# Altium PCB Sensor_Glove-X02.PcbDoc (part 2 of 3)
Units mil, origin at the board's own origin, x right, y up, seen from the top; angles counter-clockwise.
Board outline 1190 x 1020 mil, 2 copper layers (Top Layer, Bottom Layer), stack 5.556 mil thick; 101 components, 52 nets, 320 pads, 71 vias.
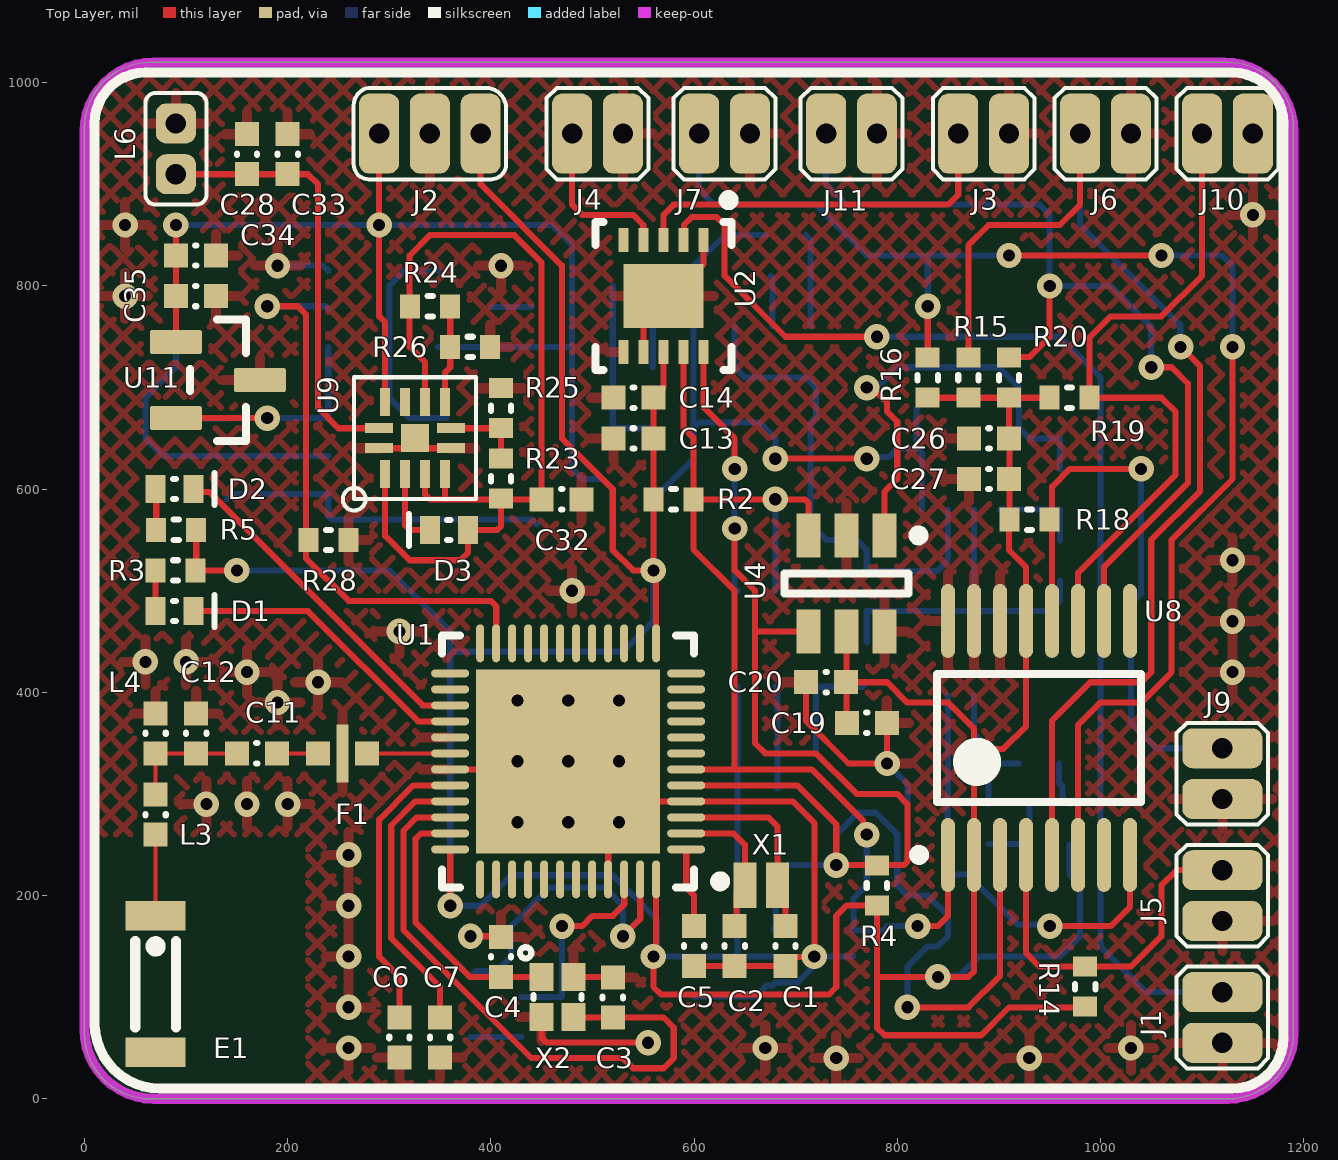
[diagram p0: Top Layer view]

## Part data (continued)
F1: "Ceramic LPF", Manufacturer=Johanson, Manufacturer Part Number=2450FM07A0029T, Supplier Part Number 1=712-1623-1-ND, ComponentLink1Description=https://datasheet.ciiva.com:443/pdfs/VipMasterIC/IC/JOHA/JOHA-S-A0003593257/JOHA-S-A0003593257-1.pdf?src-supplier=IHS+Markit, ComponentLink1URL=https://datasheet.ciiva.com:443/pdfs/VipMasterIC/IC/JOHA/JOHA-S-A0003593257/JOHA-S-A0003593257-1.pdf?src-supplier=IHS+Markit, ComponentLink2Description=https://www.johansontechnology.com/datasheets/baluns/2450FM07A0029.pdf?src-supplier=Mouser, ComponentLink2URL=https://www.johansontechnology.com/datasheets/baluns/2450FM07A0029.pdf?src-supplier=Mouser, ComponentLink3Description=https://www.johansontechnology.com/datasheets/2450FM07A0029/2450FM07A0029.pdf?src-supplier=Digi-Key, ComponentLink3URL=https://www.johansontechnology.com/datasheets/2450FM07A0029/2450FM07A0029.pdf?src-supplier=Digi-Key, Filter Type="CERAMIC LPF", Pricing 1="1=0.26000, 10=0.23200, 25=0.21000, 100=0.18380, 250=0.16124, 500=0.14250, 1000=0.11250 (USD)", REACH SVHC=Yes, RoHS=No, RoHS Compliant=No, Stock 1=185913, Supplier 1=Digi-Key
J1 J3 J4 J5 J6 J7 J9 J10 J11: library part Sensor_Interconnect, "Hole Pads for sensor interconnect solder pads"
J2: library part SMD_BATTERY_CONNECTOR, "Lithium Battery 3.7V 40mAh Rechargeable"
L1: library part I-0402(1005), "General Purpose Inductor, 0.015uH, 5%, 1 Element, Ferrite-Core, SMD, 0402", Case Code (Imperial)=0402, Case Code (Metric)=1005, Current Rating=320mA, DC Resistance (DCR)=460mR, Inductance Tolerance=5%, Manufacturer="Taiyo Yuden", Manufacturer Part Number=HK100515NJ-T, Max DC Current=300mA, Max Operating Temperature=125°C, Min Operating Temperature=-55°C, Package Quantity=10000, Self Resonant Frequency=2.3GHz, Supplier Part Number 1=587-1521-1-ND, Test Frequency=100MHz, Body Material=Ceramic, Case/Package=0402, Category="Fixed Inductors", ComponentLink1Description=https://datasheet.ciiva.com:443/pdfs/VipMasterIC/IC/TAIY/TAIY-S-A0009098652/TAIY-S-A0009098648-1.pdf?src-supplier=IHS+Markit, ComponentLink1URL=https://datasheet.ciiva.com:443/pdfs/VipMasterIC/IC/TAIY/TAIY-S-A0009098652/TAIY-S-A0009098648-1.pdf?src-supplier=IHS+Markit, ComponentLink2Description=https://datasheet.ciiva.com/6688/hk100515nj-t-ss-6688640.pdf?src-supplier=Digi-Key, ComponentLink2URL=https://datasheet.ciiva.com/6688/hk100515nj-t-ss-6688640.pdf?src-supplier=Digi-Key, ComponentLink3Description=https://datasheet.ciiva.com/8498/hk100515nj-t-ss-8498917.pdf?src-supplier=Avnet, ComponentLink3URL=https://datasheet.ciiva.com/8498/hk100515nj-t-ss-8498917.pdf?src-supplier=Avnet, ComponentLink4Description=https://datasheet.ciiva.com/26871/getdatasheetpartid-645793-26871605.pdf?src-supplier=Verical, ComponentLink4URL=https://datasheet.ciiva.com/26871/getdatasheetpartid-645793-26871605.pdf?src-supplier=Verical, ComponentLink5Description=https://datasheet.ciiva.com/15986/1443hk100515nj-t-15986294.pdf?src-supplier=Onlinecomponents.com, ComponentLink5URL=https://datasheet.ciiva.com/15986/1443hk100515nj-t-15986294.pdf?src-supplier=Onlinecomponents.com, ComponentLink6Description=https://datasheet.ciiva.com/30215/1387hk100515nj-t-30215366.pdf?src-supplier=Onlinecomponents.com, ComponentLink6URL=https://datasheet.ciiva.com/30215/1387hk100515nj-t-30215366.pdf?src-supplier=Onlinecomponents.com, Core Material=Ferrite,Ceramic, DC Current=320mA, Depth=0.55mm, Halogen Free="Halogen Free", Height=0.5mm, Height - Seated (Max)=0.022inch, Inductance=15nH, Lead Free=Exempt, Length=1.05mm, Military Standard=Not, Mount="Surface Mount", Number of Pins=2, Packaging="Tape and Reel", Pricing 1="1=0.10000, 10=0.02900, 100=0.01960, 500=0.01582, 1000=0.01351, 2500=0.01208 (USD)", Q Factor=8, Radiation Hardening=No, REACH SVHC=Unknown, RoHS=Yes, Shielding=Unshielded, Stock 1=127125, Supplier 1=Digi-Key, Termination=SMD/SMT, Tolerance=5%, Width=0.02inch
L2: library part I-0603(1608), "General Purpose Inductor, 10uH, 10%, 1 Element, Ferrite-Core, SMD, 0603", Case Code (Imperial)=0603, Case Code (Metric)=1608, Current Rating=380mA, DC Resistance (DCR)=468mR, Inductance Tolerance=10%, Manufacturer="Taiyo Yuden", Manufacturer Part Number=CBMF1608T100K, Max Operating Temperature=105°C, Min Operating Temperature=-40°C, Package Quantity=3000, Saturation Current=115mA, Self Resonant Frequency=32MHz, Supplier Part Number 1=587-1720-1-ND, Test Frequency=2.52MHz, Case/Package=0603, Category="Fixed Inductors", ComponentLink1Description=https://datasheet.ciiva.com:443/pdfs/VipMasterIC/IC/TAIY/TAIY-S-A0009098652/TAIY-S-A0009097792-1.pdf?src-supplier=IHS+Markit, ComponentLink1URL=https://datasheet.ciiva.com:443/pdfs/VipMasterIC/IC/TAIY/TAIY-S-A0009098652/TAIY-S-A0009097792-1.pdf?src-supplier=IHS+Markit, ComponentLink2Description=https://datasheet.ciiva.com/1040/cbmf1608t100k-ss-1040608.pdf?src-supplier=Digi-Key, ComponentLink2URL=https://datasheet.ciiva.com/1040/cbmf1608t100k-ss-1040608.pdf?src-supplier=Digi-Key, ComponentLink3Description=https://datasheet.ciiva.com/26871/getdatasheetpartid-638595-26871191.pdf?src-supplier=Verical, ComponentLink3URL=https://datasheet.ciiva.com/26871/getdatasheetpartid-638595-26871191.pdf?src-supplier=Verical, ComponentLink4Description=https://datasheet.ciiva.com/15981/521cbmf1608t100k-15981672.pdf?src-supplier=Onlinecomponents.com, ComponentLink4URL=https://datasheet.ciiva.com/15981/521cbmf1608t100k-15981672.pdf?src-supplier=Onlinecomponents.com, ComponentLink5Description=https://datasheet.ciiva.com/46395/1521599-46395181.pdf?src-supplier=Element14, ComponentLink5URL=https://datasheet.ciiva.com/46395/1521599-46395181.pdf?src-supplier=Element14, Composition=Wirewound, Core Material=Ferrite, DC Current=380mA, Depth=1mm, Halogen Free="Halogen Free", Height=0.8mm, Height - Seated (Max)=0.039inch, Inductance=10uH, Lead Free="Lead Free", Length=0.063inch, Max DC Current=380mA, Military Standard=Not, Mount="Surface Mount", Packaging="Tape and Reel", Pricing 1="1=0.27000, 10=0.23900, 100=0.16450, 500=0.14054, 1000=0.10764 (USD)", Radiation Hardening=No, REACH SVHC=Unknown, RoHS=Yes, Shielding=Unshielded, Stock 1=148191, Supplier 1=Digi-Key, Termination=SMD/SMT, Tolerance=10%, Width=0.031inch
L3: library part I-0402(1005), "General Purpose Inductor, 0.0039uH, 5%, 1 Element, Ceramic-Core, SMD, 0402", Case/Size Code=0402, DC Resistance (DCR)=66mR, Inductor Application="RF INDUCTOR", Inductor Type="GENERAL PURPOSE INDUCTOR", Manufacturer=Bourns, Manufacturer Part Number=CW100505-3N9J, Max Operating Temperature=125°C, Min Operating Temperature=-55°C, Package Height=0.5mm, Package Length=1mm, Package Style=SMTMeter, Package Width=0.55mm, Rated Current-Max=840mA, Self Resonant Frequency=5.8GHz, Supplier Part Number 1=CW100505-3N9JCT-ND, Test Frequency=250MHz, Tolerance=5%, Category="Fixed Inductors", ComponentLink1Description=https://datasheet.ciiva.com:443/pdfs/VipMasterIC/IC/BOUR/BOUR-S-A0006522652/BOUR-S-A0006522652-1.pdf?src-supplier=IHS+Markit, ComponentLink1URL=https://datasheet.ciiva.com:443/pdfs/VipMasterIC/IC/BOUR/BOUR-S-A0006522652/BOUR-S-A0006522652-1.pdf?src-supplier=IHS+Markit, ComponentLink2Description=https://datasheet.ciiva.com/7848/1758342-7848024.pdf?src-supplier=Element14, ComponentLink2URL=https://datasheet.ciiva.com/7848/1758342-7848024.pdf?src-supplier=Element14, ComponentLink3Description=https://datasheet.ciiva.com/6688/cw100505-6688918.pdf?src-supplier=Digi-Key, ComponentLink3URL=https://datasheet.ciiva.com/6688/cw100505-6688918.pdf?src-supplier=Digi-Key, ComponentLink4Description=https://datasheet.ciiva.com/6688/cw100505-6688919.pdf?src-supplier=Digi-Key, ComponentLink4URL=https://datasheet.ciiva.com/6688/cw100505-6688919.pdf?src-supplier=Digi-Key, ComponentLink5Description=https://datasheet.ciiva.com/3079/cw100505-3079090.pdf?src-supplier=Avnet, ComponentLink5URL=https://datasheet.ciiva.com/3079/cw100505-3079090.pdf?src-supplier=Avnet, ComponentLink6Description=https://datasheet.ciiva.com/3079/cw100505-3079776.pdf?src-supplier=Avnet, ComponentLink6URL=https://datasheet.ciiva.com/3079/cw100505-3079776.pdf?src-supplier=Avnet, Construction=Chip, Core Material=Ceramic, Inductance=0.0039uH, JESD-609 Code=e4, Number of Functions=1, Number of Pins=2, Packaging="Tape and Reel", Pricing 1="1=0.34000, 10=0.29900, 25=0.26160, 50=0.22440, 100=0.20570, 250=0.18700, 500=0.17578, 1000=0.13464, 2500=0.12716 (USD)", Quality Factor-Min (at L-nom)=20, REACH SVHC=Yes, RoHS=Yes, RoHS Compliant=Yes, Shape/Size Description="RECTANGULAR PACKAGE", Shielding=Unshielded, Stock 1=14179, Supplier 1=Digi-Key, Surface Mount=Yes, Terminal Finish=Gold, Terminal Placement="Dual Ended", Termination="One Surface"
L4: library part I-0402(1005), "General Purpose Inductor, 0.0027uH, 2%, 1 Element, SMD, 0402", DC Resistance (DCR)=47mR, Inductor Application="RF INDUCTOR", Inductor Type="GENERAL PURPOSE INDUCTOR", Manufacturer=Murata, Manufacturer Part Number=LQW15AN2N7G8ZD, Max Operating Temperature=125°C, Min Operating Temperature=-55°C, Rated Current-Max=1.5A, Self Resonant Frequency=14GHz, Supplier Part Number 1=490-15398-1-ND, Test Frequency=100MHz, Tolerance=2%, Category="Fixed Inductors", ComponentLink1Description=https://datasheet.ciiva.com:443/pdfs/VipMasterIC/IC/MURE/MURE-S-A0006159688/MURE-S-A0006159688-1.pdf?src-supplier=IHS+Markit, ComponentLink1URL=https://datasheet.ciiva.com:443/pdfs/VipMasterIC/IC/MURE/MURE-S-A0006159688/MURE-S-A0006159688-1.pdf?src-supplier=IHS+Markit, Inductance=0.0027uH, Number of Functions=1, Number of Pins=2, Pricing 1="1=0.27000, 10=0.24300, 25=0.21560, 50=0.18320, 100=0.16170, 250=0.14824, 500=0.13476, 1000=0.11319, 2500=0.09702 (USD)", Quality Factor-Min (at L-nom)=28, REACH SVHC=Yes, Reference Standard=AEC-Q200, RoHS=Yes, RoHS Compliant=Yes, Shape/Size Description="RECTANGULAR PACKAGE", Shielding=Unshielded, Stock 1=26747, Supplier 1=Digi-Key, Surface Mount=Yes, Terminal Placement="Dual Ended", Termination="One Surface"
L5: library part "Inductor Iron", "General Purpose Inductor, 1uH, 20%, 1 Element, Ferrite-Core, SMD, 0402", Case Code (Imperial)=0402, Case Code (Metric)=1005, Current Rating=450mA, DC Resistance (DCR)=455mR, Manufacturer=TDK, Manufacturer Part Number=MLZ1005M1R0WT000, Max Operating Temperature=125°C, Min Operating Temperature=-55°C, Package Quantity=10000, Saturation Current=100mA, Self Resonant Frequency=170MHz, Supplier Part Number 1=445-6379-1-ND, Test Frequency=2MHz, Tolerance=20%, Case/Package=0402, Category="Fixed Inductors", ComponentLink1Description=https://datasheet.ciiva.com:443/pdfs/VipMasterIC/IC/TDKC/TDKC-S-A0006811779/TDKC-S-A0006811779-1.pdf?src-supplier=IHS+Markit, ComponentLink1URL=https://datasheet.ciiva.com:443/pdfs/VipMasterIC/IC/TDKC/TDKC-S-A0006811779/TDKC-S-A0006811779-1.pdf?src-supplier=IHS+Markit, ComponentLink2Description=https://datasheet.ciiva.com/29699/inductor-commercial-decoupling-mlz-en-29699052.pdf?src-supplier=Digi-Key, ComponentLink2URL=https://datasheet.ciiva.com/29699/inductor-commercial-decoupling-mlz-en-29699052.pdf?src-supplier=Digi-Key, ComponentLink3Description=https://datasheet.ciiva.com/29699/inductor-commercial-decoupling-mlz-en-29699053.pdf?src-supplier=Digi-Key, ComponentLink3URL=https://datasheet.ciiva.com/29699/inductor-commercial-decoupling-mlz-en-29699053.pdf?src-supplier=Digi-Key, Core Material=Ferrite, Height - Seated (Max)=0.022inch, Inductance=1uH, Length=0.039inch, Mount="Surface Mount", Packaging="Tape and Reel", Pricing 1="1=0.29000, 10=0.25800, 100=0.17710, 500=0.15134, 1000=0.11592, 2500=0.10948 (USD)", RoHS=Yes, Shielding=Shielded, Supplier 1=Digi-Key, Width=0.02inch
L6: library part WIRELESS_CHARGING_COIL, "General Purpose Inductor, 11.8uH, 10%, 1 Element", Current Rating=700mA, DC Resistance (DCR)=750mR, Inductance=11.8uH, Inductance Tolerance=10%, Manufacturer="Wurth Electronics", Manufacturer Part Number=760308101219, Max Operating Temperature=105°C, Min Operating Temperature=-20°C, Saturation Current=1.5A, Self Resonant Frequency=22MHz, Supplier Part Number 1=732-9675-ND, ComponentLink1Description=https://datasheet.ciiva.com:443/pdfs/VipMasterIC/IC/MIDC/MIDC-S-A0003386501/MIDC-S-A0003386501-1.pdf?src-supplier=IHS+Markit, ComponentLink1URL=https://datasheet.ciiva.com:443/pdfs/VipMasterIC/IC/MIDC/MIDC-S-A0003386501/MIDC-S-A0003386501-1.pdf?src-supplier=IHS+Markit, ComponentLink2Description=http://www.farnell.com/datasheets/2039993.pdf?src-supplier=Farnell, ComponentLink2URL=http://www.farnell.com/datasheets/2039993.pdf?src-supplier=Farnell, ComponentLink3Description=http://www.farnell.com/datasheets/2039993.pdf?src-supplier=Element14, ComponentLink3URL=http://www.farnell.com/datasheets/2039993.pdf?src-supplier=Element14, Height=0.02inch, Logic Function=Receiver, Pricing 1="1=7.43000, 10=7.04000, 32=6.49000, 64=5.94000, 128=5.17000 (USD)", REACH SVHC=Unknown, RoHS=Yes, Stock 1=168, Supplier 1=Digi-Key, Tolerance=10%
R2 R4: library part R-0402(1005), "Fixed Resistor, Metal Glaze/thick Film, 0.0625W, 3300ohm, 50V, 1% +/-Tol, 100ppm/Cel, Surface Mount, 0402", Case Code (Imperial)=0402, Case Code (Metric)=1005, Manufacturer=Yageo, Manufacturer Part Number=AC0402FR-073K3L, Max Operating Temperature=155°C, Max Power Dissipation=63mW, Min Operating Temperature=-55°C, Power Rating=62.5mW, Supplier Part Number 1=YAG3483CT-ND, Temperature Coefficient=100ppm/°C, Tolerance=1%, Voltage Rating=50V, Case/Package=0402, Category="Chip SMD Resistors", ComponentLink1Description=https://datasheet.ciiva.com:443/pdfs/VipMasterIC/IC/YAGO/YAGO-S-A0003597364/YAGO-S-A0003597364-1.pdf?src-supplier=IHS+Markit, ComponentLink1URL=https://datasheet.ciiva.com:443/pdfs/VipMasterIC/IC/YAGO/YAGO-S-A0003597364/YAGO-S-A0003597364-1.pdf?src-supplier=IHS+Markit, ComponentLink2Description=http://www.mouser.com/ds/2/447/yageodocoutput-1111992.pdf?src-supplier=Mouser, ComponentLink2URL=http://www.mouser.com/ds/2/447/yageodocoutput-1111992.pdf?src-supplier=Mouser, ComponentLink3Description=http://www.yageo.com/NewPortal/yageodocoutput?fileName=/pdf/R-Chip/PYu-AC_51_RoHS_L_6.pdf&src-supplier=Digi-Key, ComponentLink3URL=http://www.yageo.com/NewPortal/yageodocoutput?fileName=/pdf/R-Chip/PYu-AC_51_RoHS_L_6.pdf&src-supplier=Digi-Key, ComponentLink4Description=http://www.yageo.com/documents/recent/PYu-AC_51_RoHS_L_2_revised.pdf?src-supplier=Future+Electronics, ComponentLink4URL=http://www.yageo.com/documents/recent/PYu-AC_51_RoHS_L_2_revised.pdf?src-supplier=Future+Electronics, Composition="Thick Film", Features="Moisture Resistant,Automotive AEC-Q200", Height=0.015inch, Lead Free="Lead Free", Length=0.039inch, Number of Terminations=2, Packaging="Tape and Reel", Pricing 1="1=0.10000, 10=0.02100, 100=0.00870, 1000=0.00390, 2500=0.00338, 5000=0.00279 (USD)", Resistance=3.3kR, RoHS=Yes, Supplier 1=Digi-Key, Termination=SMD/SMT, Width=0.02inch
R3 R5: library part R-0402(1005), "Fixed Resistor, Thin Film, 0.0625W, 422ohm, 50V, 0.1% +/-Tol, 25ppm/Cel, Surface Mount, 0402", Case Code (Imperial)=0402, Case Code (Metric)=1005, Manufacturer=Yageo, Manufacturer Part Number=RT0402BRD07422RL, Max Operating Temperature=125°C, Min Operating Temperature=-55°C, Power Rating=62.5mW, Supplier Part Number 1=YAG4263CT-ND, Temperature Coefficient=25ppm/°C, Tolerance=0.1%, Voltage Rating=50V, Case/Package=0402, Category="Chip SMD Resistors", ComponentLink1Description=https://datasheet.ciiva.com:443/pdfs/VipMasterIC/IC/YAGO/YAGO-S-A0008510989/YAGO-S-A0008510989-1.pdf?src-supplier=IHS+Markit, ComponentLink1URL=https://datasheet.ciiva.com:443/pdfs/VipMasterIC/IC/YAGO/YAGO-S-A0008510989/YAGO-S-A0008510989-1.pdf?src-supplier=IHS+Markit, ComponentLink2Description=https://datasheet.ciiva.com/12705/pyu-rt-1-to-0-05-rohs-l-4-12705867.pdf?src-supplier=Mouser, ComponentLink2URL=https://datasheet.ciiva.com/12705/pyu-rt-1-to-0-05-rohs-l-4-12705867.pdf?src-supplier=Mouser, Height=350um, Lead Free="Lead Free", Length=1mm, Packaging="Tape and Reel", Pricing 1="1=0.39000, 10=0.27800, 100=0.11140, 1000=0.05488, 2500=0.05084, 5000=0.04600 (USD)", Resistance=422R, RoHS=Yes, Stock 1=9302, Supplier 1=Digi-Key, Termination=SMD/SMT, Voltage Rating (DC)=50V, Width=500um
R6 R8 R9 R11: library part R-0402(1005), "Fixed Resistor, Metal Glaze/thick Film, 0.0625W, 0ohm, Surface Mount, 0402", Case Code (Imperial)=0402, Case Code (Metric)=1005, Manufacturer=Yageo, Manufacturer Part Number=AC0402JR-070RL, Max Operating Temperature=155°C, Max Power Dissipation=63mW, Min Operating Temperature=-55°C, Package Quantity=1, Power Rating=62.5mW, Resistor Type="Thick Film", Supplier Part Number 1=311-0.0LBCT-ND, Temperature Coefficient=200ppm/°C, Tolerance=5%, Voltage Rating=50V, Case/Package=0402, Category="Chip SMD Resistors", ComponentLink1Description=https://datasheet.ciiva.com:443/pdfs/VipMasterIC/IC/YAGO/YAGO-S-A0003597364/YAGO-S-A0003597364-1.pdf?src-supplier=IHS+Markit, ComponentLink1URL=https://datasheet.ciiva.com:443/pdfs/VipMasterIC/IC/YAGO/YAGO-S-A0003597364/YAGO-S-A0003597364-1.pdf?src-supplier=IHS+Markit, ComponentLink2Description=http://www.mouser.com/ds/2/447/yageodocoutput-1111992.pdf?src-supplier=Mouser, ComponentLink2URL=http://www.mouser.com/ds/2/447/yageodocoutput-1111992.pdf?src-supplier=Mouser, ComponentLink3Description=http://www.yageo.com/NewPortal/yageodocoutput?fileName=/pdf/R-Chip/PYu-AC_51_RoHS_L_6.pdf&src-supplier=Digi-Key, ComponentLink3URL=http://www.yageo.com/NewPortal/yageodocoutput?fileName=/pdf/R-Chip/PYu-AC_51_RoHS_L_6.pdf&src-supplier=Digi-Key, ComponentLink4Description=http://www.yageo.com/documents/recent/PYu-AC_51_RoHS_L_2_revised.pdf?src-supplier=Future+Electronics, ComponentLink4URL=http://www.yageo.com/documents/recent/PYu-AC_51_RoHS_L_2_revised.pdf?src-supplier=Future+Electronics, Features="Moisture Resistant,Automotive AEC-Q200,Anti-Sulfur", Height=0.015inch, Lead Free="Lead Free", Length=0.039inch, Number of Terminations=2, Packaging="Tape and Reel", Pricing 1="1=0.10000, 10=0.01900, 25=0.01400, 50=0.01080, 100=0.00790, 250=0.00604, 500=0.00482, 1000=0.00355, 5000=0.00255 (USD)", Resistance=0mR, RoHS=Yes, Stock 1=1100119, Supplier 1=Digi-Key, Termination=SMD/SMT, Width=0.02inch
R7 R10 R14 R15 R16 R18 R19 R20 R21 R22: library part R-0402(1005), "___ OHM ___ mW 0402(1005) SMD"
R12 R13: library part R-0402(1005), "Fixed Resistor, Metal Glaze/thick Film, 0.0625W, 100000ohm, 50V, 1% +/-Tol, 100ppm/Cel, Surface Mount, 0402", Case Code (Imperial)=0402, Case Code (Metric)=1005, Manufacturer=Yageo, Manufacturer Part Number=AC0402FR-07100KL, Max Operating Temperature=155°C, Max Power Dissipation=63mW, Min Operating Temperature=-55°C, Power Rating=62.5mW, Resistor Type="Thick Film", Supplier Part Number 1=YAG3434CT-ND, Temperature Coefficient=100ppm/°C, Tolerance=1%, Voltage Rating=50V, Case/Package=0402, Category="Chip SMD Resistors", ComponentLink1Description=https://datasheet.ciiva.com:443/pdfs/VipMasterIC/IC/YAGO/YAGO-S-A0003597364/YAGO-S-A0003597364-1.pdf?src-supplier=IHS+Markit, ComponentLink1URL=https://datasheet.ciiva.com:443/pdfs/VipMasterIC/IC/YAGO/YAGO-S-A0003597364/YAGO-S-A0003597364-1.pdf?src-supplier=IHS+Markit, ComponentLink2Description=http://components.arrow.com/part/dataview/0323_03348509?src-supplier=Arrow+Europe, ComponentLink2URL=http://components.arrow.com/part/dataview/0323_03348509?src-supplier=Arrow+Europe, ComponentLink3Description=http://www.yageo.com/NewPortal/yageodocoutput?fileName=/pdf/R-Chip/PYu-AC_51_RoHS_L_6.pdf&src-supplier=Digi-Key, ComponentLink3URL=http://www.yageo.com/NewPortal/yageodocoutput?fileName=/pdf/R-Chip/PYu-AC_51_RoHS_L_6.pdf&src-supplier=Digi-Key, ComponentLink4Description=http://www.yageo.com/documents/recent/PYu-AC_51_RoHS_L_2.pdf?src-supplier=Mouser, ComponentLink4URL=http://www.yageo.com/documents/recent/PYu-AC_51_RoHS_L_2.pdf?src-supplier=Mouser, ComponentLink5Description=http://www.yageo.com/documents/recent/PYu-AC_51_RoHS_L_2_revised.pdf?src-supplier=Future+Electronics, ComponentLink5URL=http://www.yageo.com/documents/recent/PYu-AC_51_RoHS_L_2_revised.pdf?src-supplier=Future+Electronics, Depth=0.5mm, Features="Moisture Resistant,Automotive AEC-Q200", Height=0.015inch, Lead Free="Lead Free", Length=1mm, Military Standard=Not, Number of Terminations=2, Packaging="Tape and Reel", Pricing 1="1=0.10000, 10=0.02000, 100=0.00830, 1000=0.00374, 2500=0.00324, 5000=0.00268 (USD)", Resistance=100kR, RoHS=Yes, Stock 1=239006, Supplier 1=Digi-Key, Termination=SMD/SMT, Width=0.02inch
R23 R24 R25 R26: library part R-0402(1005), "Fixed Resistor, Metal Glaze/thick Film, 0.0625W, 0ohm, Surface Mount, 0402", Manufacturer=Yageo, Manufacturer Part Number=AC0402JR-070RL, Max Operating Temperature=155°C, Min Operating Temperature=-55°C, Package Height=0.32mm, Package Length=1mm, Package Shape=Rectangular, Package Style=SMTMeter, Package Width=0.5mm, Rated Power Dissipation (P)=62.5mW, Rated Temperature=70°C, Resistor Type="FIXED RESISTOR", Supplier Part Number 1=311-0.0LBCT-ND, Category="Chip SMD Resistors", ComponentLink1Description=https://datasheet.ciiva.com:443/pdfs/VipMasterIC/IC/YAGO/YAGO-S-A0003597364/YAGO-S-A0003597364-1.pdf?src-supplier=IHS+Markit, ComponentLink1URL=https://datasheet.ciiva.com:443/pdfs/VipMasterIC/IC/YAGO/YAGO-S-A0003597364/YAGO-S-A0003597364-1.pdf?src-supplier=IHS+Markit, ComponentLink2Description=http://www.mouser.com/ds/2/447/yageodocoutput-1111992.pdf?src-supplier=Mouser, ComponentLink2URL=http://www.mouser.com/ds/2/447/yageodocoutput-1111992.pdf?src-supplier=Mouser, ComponentLink3Description=http://www.yageo.com/NewPortal/yageodocoutput?fileName=/pdf/R-Chip/PYu-AC_51_RoHS_L_6.pdf&src-supplier=Digi-Key, ComponentLink3URL=http://www.yageo.com/NewPortal/yageodocoutput?fileName=/pdf/R-Chip/PYu-AC_51_RoHS_L_6.pdf&src-supplier=Digi-Key, ComponentLink4Description=http://www.yageo.com/documents/recent/PYu-AC_51_RoHS_L_2_revised.pdf?src-supplier=Future+Electronics, ComponentLink4URL=http://www.yageo.com/documents/recent/PYu-AC_51_RoHS_L_2_revised.pdf?src-supplier=Future+Electronics, Construction=Chip, JESD-609 Code=e3, Mount="Surface Mount", Number of Pins=2, Packaging="Tape and Reel", Pricing 1="1=0.10000, 10=0.01800, 25=0.01320, 50=0.01000, 100=0.00740, 250=0.00564, 500=0.00450, 1000=0.00331, 5000=0.00238 (USD)", REACH SVHC=Yes, Reference Standard=AEC-Q200, Resistance=0R, RoHS=Yes, RoHS Compliant=Yes, Size Code=0402, Stock 1=1061562, Supplier 1=Digi-Key, Technology="METAL GLAZE/THICK FILM", Terminal Finish=Nickel, Termination=Wraparound
R27 R28: library part R-0402(1005), "Fixed Resistor, Metal Glaze/thick Film, 0.0625W, 1000000ohm, 50V, 1% +/-Tol, 100ppm/Cel, Surface Mount, 0402", Manufacturer=Yageo, Manufacturer Part Number=AC0402FR-071ML, Max Operating Temperature=155°C, Min Operating Temperature=-55°C, Package Height=0.32mm, Package Length=1mm, Package Shape=Rectangular, Package Style=SMTMeter, Package Width=0.5mm, Rated Power Dissipation (P)=62.5mW, Rated Temperature=70°C, Resistor Type="FIXED RESISTOR", Supplier Part Number 1=YAG3450CT-ND, Temperature Coefficient=100ppm/°C, Tolerance=1%, Working Voltage=50V, Additional Feature="LASER TRIMMABLE", Category="Chip SMD Resistors", ComponentLink1Description=https://datasheet.ciiva.com:443/pdfs/VipMasterIC/IC/YAGO/YAGO-S-A0003597364/YAGO-S-A0003597364-1.pdf?src-supplier=IHS+Markit, ComponentLink1URL=https://datasheet.ciiva.com:443/pdfs/VipMasterIC/IC/YAGO/YAGO-S-A0003597364/YAGO-S-A0003597364-1.pdf?src-supplier=IHS+Markit, ComponentLink2Description=http://components.arrow.com/part/dataview/0323_03348700?src-supplier=Arrow+Europe, ComponentLink2URL=http://components.arrow.com/part/dataview/0323_03348700?src-supplier=Arrow+Europe, ComponentLink3Description=http://www.yageo.com/documents/recent/PYu-AC_51_RoHS_L_2.pdf?src-supplier=Mouser, ComponentLink3URL=http://www.yageo.com/documents/recent/PYu-AC_51_RoHS_L_2.pdf?src-supplier=Mouser, ComponentLink4Description=http://www.yageo.com/NewPortal/yageodocoutput?fileName=/pdf/R-Chip/PYu-AC_51_RoHS_L_6.pdf&src-supplier=Digi-Key, ComponentLink4URL=http://www.yageo.com/NewPortal/yageodocoutput?fileName=/pdf/R-Chip/PYu-AC_51_RoHS_L_6.pdf&src-supplier=Digi-Key, ComponentLink5Description=http://www.yageo.com/documents/recent/PYu-AC_51_RoHS_L_2_revised.pdf?src-supplier=Future+Electronics, ComponentLink5URL=http://www.yageo.com/documents/recent/PYu-AC_51_RoHS_L_2_revised.pdf?src-supplier=Future+Electronics, Construction=Chip, JESD-609 Code=e3, Mount="Surface Mount", Number of Pins=2, Packaging="Tape and Reel", Pricing 1="1=0.10000, 10=0.01900, 100=0.00780, 1000=0.00350, 2500=0.00304, 5000=0.00251 (USD)", Reference Standard=AEC-Q200, Resistance=1MR, RoHS=Yes, Size Code=0402, Stock 1=11166, Supplier 1=Digi-Key, Technology="METAL GLAZE/THICK FILM", Terminal Finish=Nickel, Termination=Wraparound
U1: library part NRSC-NRF52832-QF-48, "Multiprotocol Bluetooth Smart, ANT/ANT+ and Proprietary System-on-Chip, 2.4 GHz, 256 KB FLASH, 1.7 to 3.6 V, -40 to 85 degC, 48-Pin QFN, RoHS, Tape and Reel", Current - Receiving=5.4mA, Current - Transmitting=7.5mA, Frequency=2.4GHz, Manufacturer="Nordic Semiconductor", Supplier Part Number 1=1490-1067-1-ND, Category="RF Receivers, Transceivers", ComponentLink1Description=https://datasheet.ciiva.com:443/pdfs/VipMasterIC/IC/NRSA/NRSA-S-A0002414264/NRSA-S-A0002414264-1.pdf?src-supplier=IHS+Markit, ComponentLink1URL=https://datasheet.ciiva.com:443/pdfs/VipMasterIC/IC/NRSA/NRSA-S-A0002414264/NRSA-S-A0002414264-1.pdf?src-supplier=IHS+Markit, ComponentLink5Description=http://infocenter.nordicsemi.com/pdf/nRF52832_PB_v1.7.pdf?src-supplier=Digi-Key, ComponentLink5URL=http://infocenter.nordicsemi.com/pdf/nRF52832_PB_v1.7.pdf?src-supplier=Digi-Key, ComponentLink6Description=http://infocenter.nordicsemi.com/pdf/nRF52832_PS_v1.4.pdf?src-supplier=Digi-Key, ComponentLink6URL=http://infocenter.nordicsemi.com/pdf/nRF52832_PS_v1.4.pdf?src-supplier=Digi-Key, Data Rate=2Mbps, Interface=SPI,UART, Manufacturer Part Number=NRF52832-QFAA-R7, Memory Size=64KB, Number of GPIO=32, Packaging="Tape and Reel", Pricing 1="1=5.46000, 10=4.87500, 25=4.38760, 100=3.99750, 250=3.60752, 500=3.23700 (USD)", RoHS=No, Sensitivity=-96dBm, Stock 1=7487, Supplier 1=Digi-Key
U2: library part FDC1004, "Analog Circuit, 1 Func, 4 Channel, PDSO10", Manufacturer="Texas Instruments", Manufacturer Part Number=FDC1004DSCR, Max Operating Temperature=125°C, Min Operating Temperature=-40°C, Supplier Part Number 1=296-46090-1-ND, Category="Integrated Circuits (ICs)", ComponentLink1Description=https://www.ti.com:443/lit/ds/symlink/fdc1004.pdf?src-supplier=IHS+Markit, ComponentLink1URL=https://www.ti.com:443/lit/ds/symlink/fdc1004.pdf?src-supplier=IHS+Markit, ComponentLink2Description=https://datasheet.ciiva.com/48512/fdc1004-48512055.pdf?src-supplier=Avnet, ComponentLink2URL=https://datasheet.ciiva.com/48512/fdc1004-48512055.pdf?src-supplier=Avnet, Interface=I2C, Lead Free="Lead Free", Number of Inputs=4, Number of Pins=10, Packaging="Tape and Reel", Pricing 1="1=7.13000, 5=6.25000, 10=5.62500, 25=5.00000, 50=4.62500, 100=4.00000, 500=3.75000 (USD)", Radiation Hardening=No, RoHS=Yes, Stock 1=1027, Supplier 1=Digi-Key
U3: library part bceab6869a9cb85cf5675529ee35ce4, "TEMPERATURE SENSOR", Ambient Temperature Range High=+150°C, Ambient Temperature Range Low=-55°C, Manufacturer="Texas Instruments", Max Operating Temperature=150°C, Max Supply Voltage=5.5V, Min Supply Voltage=1.8V, Operating Supply Current=3.5-16uA, Package=DRV0006A, Supplier Part Number 1=296-51834-1-ND, Temperature="-55°C to +150°C", Automotive=No, Category=IC, ComponentLink1Description=https://www.ti.com:443/lit/ds/symlink/tmp117.pdf?src-supplier=IHS+Markit, ComponentLink1URL=https://www.ti.com:443/lit/ds/symlink/tmp117.pdf?src-supplier=IHS+Markit, ComponentLink2Description=Datasheet, ComponentLink2URL=http://www.ti.com/lit/ds/symlink/tmp117.pdf, ComponentLink3Description=http://www.ti.com/lit/gpn/tmp117?src-supplier=Digi-Key, ComponentLink3URL=http://www.ti.com/lit/gpn/tmp117?src-supplier=Digi-Key, Device Class L1=Sensors, Device Class L2="Temperature and Humidity Sensors", Device Class L3=unset, Digikey Description="TEMPERATURE SENSOR", Height=0.8mm, Interface=I2C,2-Wire,SMBus, Ipc Land Pattern Name=DFN200X200X80-6, Lead Free=Yes, Manufacturer Part Number=TMP117AIDRVR, Max Junction Temp=+150°C, Min Operating Temperature=-55°C, Mount="Surface Mount", Octopart=https://octopart.com/tmp117aidrvr-texas+instruments-95511044, Output Type=I2C, Packaging="Cut Tape", Pricing 1="1=8.02000, 5=7.07600, 10=6.25000, 25=5.07040, 50=4.48100, 100=4.36300, 500=3.65552, 1000=3.41968 (USD)", Resolution=16bits, RoHS=TRUE, Standoff Height=0mm, Stock 1=3558, Supplier 1=Digi-Key, Temperature Range High=+150°C, Temperature Range Low=-55°C
U4: library part CMP-0003-00255-2, "Self-Calibrating, 16-Bit ADC, -40 to 85 degC, 6-pin SOT23 (DBV6), Green (RoHS & no Sb/Br)", Case/Package=SOT-23, Manufacturer="Texas Instruments", Max Operating Temperature=85°C, Max Power Dissipation=750uW, Max Supply Voltage=5.5V, Min Operating Temperature=-40°C, Min Supply Voltage=2.7V, Nominal Supply Current=90uA, Operating Supply Voltage=5V, Package Quantity=250, Supplier Part Number 1=296-14298-1-ND, Category="Analog to Digital Converters (ADCs)", ComponentLink1Description=https://www.ti.com:443/lit/ds/symlink/ads1100.pdf?src-supplier=IHS+Markit, ComponentLink1URL=https://www.ti.com:443/lit/ds/symlink/ads1100.pdf?src-supplier=IHS+Markit, ComponentLink2Description=https://datasheet.ciiva.com/7226/70865-7226785.pdf?src-supplier=Newark, ComponentLink2URL=https://datasheet.ciiva.com/7226/70865-7226785.pdf?src-supplier=Newark, ComponentLink3Description=https://datasheet.ciiva.com/26943/getdatasheetpartid-228526-26943613.pdf?src-supplier=Verical, ComponentLink3URL=https://datasheet.ciiva.com/26943/getdatasheetpartid-228526-26943613.pdf?src-supplier=Verical, ComponentLink4Description=https://datasheet.ciiva.com/26797/ads1100a1idbvt-26797549.pdf?src-supplier=IIIC, ComponentLink4URL=https://datasheet.ciiva.com/26797/ads1100a1idbvt-26797549.pdf?src-supplier=IIIC, ComponentLink5Description=https://datasheet.ciiva.com/1261/ads1100-1261111.pdf?src-supplier=Digi-Key, ComponentLink5URL=https://datasheet.ciiva.com/1261/ads1100-1261111.pdf?src-supplier=Digi-Key, ComponentLink6Description=https://datasheet.ciiva.com/3038/sbas239b-3038715.pdf?src-supplier=Avnet, ComponentLink6URL=https://datasheet.ciiva.com/3038/sbas239b-3038715.pdf?src-supplier=Avnet, ComponentLink7Description=https://datasheet.ciiva.com/1261/ads1100-1261110.pdf?src-supplier=Digi-Key, ComponentLink7URL=https://datasheet.ciiva.com/1261/ads1100-1261110.pdf?src-supplier=Digi-Key, ComponentLink8Description=https://datasheet.ciiva.com/26236/sbas239b-26236358.pdf?src-supplier=Avnet+Europe, ComponentLink8URL=https://datasheet.ciiva.com/26236/sbas239b-26236358.pdf?src-supplier=Avnet+Europe, ComponentLink9Description=https://datasheet.ciiva.com/1261/ads1100-1261112.pdf?src-supplier=Digi-Key, ComponentLink9URL=https://datasheet.ciiva.com/1261/ads1100-1261112.pdf?src-supplier=Digi-Key, ComponentLink10Description=https://datasheet.ciiva.com/22696/1882275-22696410.pdf?src-supplier=Element14, ComponentLink10URL=https://datasheet.ciiva.com/22696/1882275-22696410.pdf?src-supplier=Element14, ComponentLink11Description=https://datasheet.ciiva.com/3038/sbas239b-3038716.pdf?src-supplier=Avnet, ComponentLink11URL=https://datasheet.ciiva.com/3038/sbas239b-3038716.pdf?src-supplier=Avnet, Contact Plating=Gold, Conversion Rate=128S/s, Differential Nonlinearity=1LSB, Height=1.15mm, Interface=I2C, Lead Free="Lead Free", Length=2.9mm, Manufacturer Part Number=ADS1100A1IDBVT, Max Supply Voltage (DC)=5.5V, Min Supply Voltage (DC)=2.7V, Number of A/D Converters=1, Number of Analog Inputs=1, Number of Bits=16, Number of Channels=1, Number of Converters=1, Number of Elements=1, Number of Inputs=1, Number of Pins=6, Packaging="Tape and Reel", Polarity=Bipolar, Power Dissipation=750uW, Pricing 1="1=5.33000, 10=4.79100, 25=4.52920, 100=3.72410 (USD)", Radiation Hardening=No, REACH SVHC="No SVHC", Resolution=16b, RoHS=Yes, Sampling Rate=128S/s, Stock 1=376, Supplier 1=Digi-Key, Supply Type=Single, Width=1.6mm
U5: library part AD8237, "Instrumentation Amplifier, 1 Func, 75uV Offset-Max, 0.2MHz Band Width, CMOS, PDSO8", Case/Package=MSOP, Input Bias Current=250pA, Input Offset Voltage (Vos)=75uV, Manufacturer="Analog Devices", Manufacturer Part Number=AD8237ARMZ-R7, Max Operating Temperature=125°C, Max Supply Voltage=5.5V, Min Operating Temperature=-40°C, Min Supply Voltage=1.8V, Nominal Supply Current=115uA, Output Current per Channel=4mA, Package Quantity=1, Supplier Part Number 1=AD8237ARMZ-R7CT-ND, Voltage Gain=60dB, -3db Bandwidth=200kHz, Bandwidth=20kHz, Category="Amplifiers - Op Amps, Buffer, Instrumentation", Common Mode Rejection Ratio=106dB, ComponentLink1Description=https://datasheet.ciiva.com:443/pdfs/VipMasterIC/IC/ANDI/ANDIS13412/ANDIS13412-1.pdf?src-supplier=IHS+Markit, ComponentLink1URL=https://datasheet.ciiva.com:443/pdfs/VipMasterIC/IC/ANDI/ANDIS13412/ANDIS13412-1.pdf?src-supplier=IHS+Markit, ComponentLink2Description=https://datasheet.ciiva.com/6626/ad8237-6626733.pdf?src-supplier=Digi-Key, ComponentLink2URL=https://datasheet.ciiva.com/6626/ad8237-6626733.pdf?src-supplier=Digi-Key, ComponentLink3Description=https://datasheet.ciiva.com/8582/ad8237-8582303.pdf?src-supplier=Avnet, ComponentLink3URL=https://datasheet.ciiva.com/8582/ad8237-8582303.pdf?src-supplier=Avnet, Contact Plating=Tin,Matte, Lead Free="Contains Lead", Mount="Surface Mount", Number of Channels=1, Number of Circuits=1, Number of Elements=1, Number of Pins=8, Operating Supply Current=115uA, Packaging="Tape and Reel", Pricing 1="1=2.68000, 10=2.40400, 25=2.27240, 100=1.86850, 250=1.67660, 500=1.61600 (USD)", RoHS=Yes, Slew Rate=0.15V/µs, Stock 1=18084, Supplier 1=Digi-Key
U6: library part CMP-0384-01459-1, "Single Channel Rail-to-Rail Operational Amplifier, 95 Hz BW, 13 mV/us SR, Industrial, 5-pin SOT23 (RJ-5), Reel", Case/Package=SOT-23-5, Input Bias Current=1pA, Input Capacitance=4.2pF, Input Offset Voltage (Vos)=2.5mV, Manufacturer="Analog Devices", Max Dual Supply Voltage=2.5V, Max Operating Temperature=125°C, Max Supply Voltage=5V, Min Dual Supply Voltage=900mV, Min Operating Temperature=-40°C, Min Supply Voltage=1.8V, Operating Supply Current=25.5uA, Operating Supply Voltage=3V, Output Current per Channel=45mA, Package Quantity=3000, Power Supply Rejection Ratio (PSRR)=110dB, Supplier Part Number 1=AD8505ARJZ-R7CT-ND, Voltage Gain=120dB, Bandwidth=95kHz, Category="Amplifiers - Op Amps, Buffer, Instrumentation", Common Mode Rejection Ratio=90dB, ComponentLink1Description=https://datasheet.ciiva.com:443/pdfs/VipMasterIC/IC/ANDI/ANDI-S-A0003407821/ANDI-S-A0003407815-1.pdf?src-supplier=IHS+Markit, ComponentLink1URL=https://datasheet.ciiva.com:443/pdfs/VipMasterIC/IC/ANDI/ANDI-S-A0003407821/ANDI-S-A0003407815-1.pdf?src-supplier=IHS+Markit, ComponentLink2Description=https://datasheet.ciiva.com/22712/1610834-22712017.pdf?src-supplier=Element14, ComponentLink2URL=https://datasheet.ciiva.com/22712/1610834-22712017.pdf?src-supplier=Element14, ComponentLink3Description=https://datasheet.ciiva.com/11711/ad8505-8506-8508-11711719.pdf?src-supplier=Avnet, ComponentLink3URL=https://datasheet.ciiva.com/11711/ad8505-8506-8508-11711719.pdf?src-supplier=Avnet, ComponentLink4Description=https://datasheet.ciiva.com/1135/1610834-1135532.pdf?src-supplier=Element14, ComponentLink4URL=https://datasheet.ciiva.com/1135/1610834-1135532.pdf?src-supplier=Element14, Contact Plating=Tin,Matte, Gain Bandwidth Product=95kHz, Lead Free="Contains Lead", Manufacturer Part Number=AD8505ARJZ-R7, Number of Amplifiers=1, Number of Channels=1, Number of Circuits=1, Number of Elements=1, Number of Pins=5, Packaging="Tape and Reel", Pricing 1="1=1.55000, 10=1.38700, 25=1.31600, 100=1.01050, 250=0.89300, 500=0.84600, 1000=0.68150 (USD)", Quiescent Current=25.5uA, REACH SVHC="No SVHC", RoHS=Yes, Slew Rate=0.013V/µs, Stock 1=2044, Supplier 1=Digi-Key, Unity Gain Bandwidth Product=95kHz
U7: library part CMP-0004-00333-1, "Low-Power, 8-Bit DAC with High-Speed I2C Input, -40 to 105 degC, 6-pin SOT23 (DBV6), Green (RoHS & no Sb/Br)", Case/Package=SOT-23, Manufacturer="Texas Instruments", Max Operating Temperature=105°C, Max Supply Voltage=5.5V, Min Operating Temperature=-40°C, Min Supply Voltage=2.7V, Nominal Supply Current=155uA, Operating Supply Voltage=5V, Package Quantity=250, Power Consumption=400uW, Supplier Part Number 1=296-17199-1-ND, Category="Digital to Analog Converters (DACs)", ComponentLink1Description=https://www.ti.com:443/lit/ds/symlink/dac5571.pdf?src-supplier=IHS+Markit, ComponentLink1URL=https://www.ti.com:443/lit/ds/symlink/dac5571.pdf?src-supplier=IHS+Markit, ComponentLink2Description=https://datasheet.ciiva.com/15146/getdatasheetpartid-184785-15146834.pdf?src-supplier=Verical, ComponentLink2URL=https://datasheet.ciiva.com/15146/getdatasheetpartid-184785-15146834.pdf?src-supplier=Verical, ComponentLink3Description=https://datasheet.ciiva.com/1597/dac5571-1597245.pdf?src-supplier=Newark, ComponentLink3URL=https://datasheet.ciiva.com/1597/dac5571-1597245.pdf?src-supplier=Newark, ComponentLink4Description=https://datasheet.ciiva.com/34302/1337393-34302226.pdf?src-supplier=Jameco, ComponentLink4URL=https://datasheet.ciiva.com/34302/1337393-34302226.pdf?src-supplier=Jameco, ComponentLink5Description=https://datasheet.ciiva.com/4779/slas405a-117423-4779268.pdf?src-supplier=Mouser, ComponentLink5URL=https://datasheet.ciiva.com/4779/slas405a-117423-4779268.pdf?src-supplier=Mouser, ComponentLink6Description=https://datasheet.ciiva.com/41460/001186519-da-01-en-8-bit-12c-single-dac5571idbvt-sot-23-tid-41460679.pdf?src-supplier=Conrad, ComponentLink6URL=https://datasheet.ciiva.com/41460/001186519-da-01-en-8-bit-12c-single-dac5571idbvt-sot-23-tid-41460679.pdf?src-supplier=Conrad, ComponentLink7Description=https://datasheet.ciiva.com/26235/dac5571-26235157.pdf?src-supplier=Avnet+Europe, ComponentLink7URL=https://datasheet.ciiva.com/26235/dac5571-26235157.pdf?src-supplier=Avnet+Europe, ComponentLink8Description=https://datasheet.ciiva.com/1362/dac5571-1362876.pdf?src-supplier=Digi-Key, ComponentLink8URL=https://datasheet.ciiva.com/1362/dac5571-1362876.pdf?src-supplier=Digi-Key, ComponentLink9Description=https://datasheet.ciiva.com/1362/dac5571-1362877.pdf?src-supplier=Digi-Key, ComponentLink9URL=https://datasheet.ciiva.com/1362/dac5571-1362877.pdf?src-supplier=Digi-Key, ComponentLink10Description=https://datasheet.ciiva.com/1362/dac5571-1362878.pdf?src-supplier=Digi-Key, ComponentLink10URL=https://datasheet.ciiva.com/1362/dac5571-1362878.pdf?src-supplier=Digi-Key, ComponentLink11Description=https://datasheet.ciiva.com/3040/dac5571-3040451.pdf?src-supplier=Avnet, ComponentLink11URL=https://datasheet.ciiva.com/3040/dac5571-3040451.pdf?src-supplier=Avnet, ComponentLink12Description=https://datasheet.ciiva.com/3040/dac5571-3040452.pdf?src-supplier=Avnet, ComponentLink12URL=https://datasheet.ciiva.com/3040/dac5571-3040452.pdf?src-supplier=Avnet, ComponentLink13Description=https://datasheet.ciiva.com/46430/1762718-46430597.pdf?src-supplier=Element14, ComponentLink13URL=https://datasheet.ciiva.com/46430/1762718-46430597.pdf?src-supplier=Element14, Contact Plating=Gold, Conversion Rate=188KS/s, Differential Nonlinearity=0.25LSB, Height=1.15mm, Integral Nonlinearity (INL)=1LSB, Interface=I2C, Lead Free="Lead Free", Length=2.9mm, Manufacturer Part Number=DAC5571IDBVT, Number of Bits=8, Number of Channels=1, Number of Converters=1, Number of DAC Channels=1, Number of Pins=6, Operating Supply Current=155uA, Output Type=Voltage, Packaging="Tape and Reel", Polarity=Unipolar, Pricing 1="1=1.49000, 10=1.34100, 25=1.26520, 100=1.01200 (USD)", Radiation Hardening=No, REACH SVHC="No SVHC", Resolution=8b, RoHS=Yes, Sampling Rate=188KS/s, Settling Time=8us, Stock 1=4888, Supplier 1=Digi-Key, Supply Type=Single, Weight=0.00127oz, Width=1.6mm
U8: library part CMP-0798-00197-1, "CMOS, Low Voltage, 2-Wire Serially Controlled, Matrix Switch, -40 to 85 degC, 16-pin SOP (RU-16), Tube", Case/Package=TSSOP, Drain to Source Resistance=2.5R, High Level Output Current=120mA, Manufacturer="Analog Devices", Max Operating Temperature=85°C, Max Power Dissipation=100uW, Max Supply Current=20uA, Max Supply Voltage=5.5V, Min Operating Temperature=-40°C, Min Supply Voltage=2.7V, On-State Resistance=4.5R, Operating Supply Current=10uA, Package Quantity=96, Supplier Part Number 1=ADG728BRUZ-ND, -3db Bandwidth=65MHz, Bandwidth=65MHz, Category="Decoders and Multiplexers", ComponentLink1Description=https://datasheet.ciiva.com:443/pdfs/VipMasterIC/IC/ANDI/ANDIS13257/ANDIS13257-1.pdf?src-supplier=IHS+Markit, ComponentLink1URL=https://datasheet.ciiva.com:443/pdfs/VipMasterIC/IC/ANDI/ANDIS13257/ANDIS13257-1.pdf?src-supplier=IHS+Markit, ComponentLink2Description=https://datasheet.ciiva.com/1171/1610644-1171108.pdf?src-supplier=Element14, ComponentLink2URL=https://datasheet.ciiva.com/1171/1610644-1171108.pdf?src-supplier=Element14, ComponentLink3Description=https://datasheet.ciiva.com/5797/adg728-729-5797207.pdf?src-supplier=Farnell, ComponentLink3URL=https://datasheet.ciiva.com/5797/adg728-729-5797207.pdf?src-supplier=Farnell, ComponentLink4Description=https://datasheet.ciiva.com/1668/adg728-729-1668904.pdf?src-supplier=Digi-Key, ComponentLink4URL=https://datasheet.ciiva.com/1668/adg728-729-1668904.pdf?src-supplier=Digi-Key, ComponentLink5Description=https://datasheet.ciiva.com/2978/adg728-729-2978667.pdf?src-supplier=Avnet, ComponentLink5URL=https://datasheet.ciiva.com/2978/adg728-729-2978667.pdf?src-supplier=Avnet, ComponentLink6Description=https://datasheet.ciiva.com/7986/adg728-729-7986413.pdf?src-supplier=Element14, ComponentLink6URL=https://datasheet.ciiva.com/7986/adg728-729-7986413.pdf?src-supplier=Element14, ComponentLink7Description=https://datasheet.ciiva.com/48708/001248036-da-01-en-ic-mux-demux-8x1-adg728bruz-tssop-16-adi-48708636.pdf?src-supplier=Conrad, ComponentLink7URL=https://datasheet.ciiva.com/48708/001248036-da-01-en-ic-mux-demux-8x1-adg728bruz-tssop-16-adi-48708636.pdf?src-supplier=Conrad, Contact Plating=Tin,Matte, Height=1.05mm, Interface=Serial,2-Wire, Lead Free="Contains Lead", Length=5mm, Manufacturer Part Number=ADG728BRUZ, Nominal Supply Current=20uA, Number of Bits=8, Number of Channels=1, Number of Circuits=1, Number of Inputs=8, Number of Outputs=1, Number of Pins=16, Packaging=Rail/Tube, Pricing 1="1=5.54000, 10=4.97400, 25=4.70240, 100=3.86650, 250=3.46940, 500=3.34400, 1000=3.03050 (USD)", Radiation Hardening=No, REACH SVHC="No SVHC", RoHS=Yes, Stock 1=1351, Supplier 1=Digi-Key, Throw Configuration=DPST, Turn-Off Delay Time=85ns, Turn-On Delay Time=95ns, Width=4.4mm
U9: "Power Supply Support Circuit, Adjustable, 1 Channel, CMOS", Manufacturer="Analog Devices", Manufacturer Part Number=LTC4124EV#TRMPBF, Supplier Part Number 1=LTC4124EV#TRMPBFCT-ND, Category="Battery Management", ComponentLink1Description=https://datasheet.ciiva.com:443/pdfs/VipMasterIC/IC/ANDI/ANDI-S-A0007901877/ANDI-S-A0007901877-1.pdf?src-supplier=IHS+Markit, ComponentLink1URL=https://datasheet.ciiva.com:443/pdfs/VipMasterIC/IC/ANDI/ANDI-S-A0007901877/ANDI-S-A0007901877-1.pdf?src-supplier=IHS+Markit, Pricing 1="1=6.36000, 10=5.74300, 25=5.47600, 100=4.75470, 250=4.54104 (USD)", RoHS=Yes, Supplier 1=Digi-Key
U10: "Fixed Positive LDO Regulator", Manufacturer=ABLIC, Supplier Part Number 1=1662-S-1318A30-M5T1U4CT-ND, Manufacturer Part Number=S-1318A30-M5T1U4, RoHS=Yes, Supplier 1=Digi-Key
U11: library part CMP-04937-000003-1, "LP HALL 32FBDBZR", Case/Package=TO-236-3, Manufacturer="Texas Instruments", Max Operating Temperature=85°C, Max Output Current=5mA, Max Supply Current=2.6mA, Min Operating Temperature=-40°C, Supplier Part Number 1=296-47323-1-ND, Category="Integrated Circuits (ICs)", ComponentLink1Description=https://www.ti.com:443/lit/ds/symlink/drv5032.pdf?src-supplier=IHS+Markit, ComponentLink1URL=https://www.ti.com:443/lit/ds/symlink/drv5032.pdf?src-supplier=IHS+Markit, ComponentLink2Description=Datasheet, ComponentLink2URL=http://www.ti.com/lit/ds/symlink/drv5032.pdf, ComponentLink3Description=http://www.ti.com/lit/ds/symlink/drv5032.pdf?src-supplier=Digi-Key, ComponentLink3URL=http://www.ti.com/lit/ds/symlink/drv5032.pdf?src-supplier=Digi-Key, ComponentLink4Description=http://www.ti.com/general/docs/suppproductinfo.tsp?distId=10&amp;gotoUrl=http%3A%2F%2Fwww.ti.com%2Flit%2Fgpn%2Fdrv5032&src-supplier=Digi-Key, ComponentLink4URL=http://www.ti.com/general/docs/suppproductinfo.tsp?distId=10&amp;gotoUrl=http%3A%2F%2Fwww.ti.com%2Flit%2Fgpn%2Fdrv5032&src-supplier=Digi-Key, Manufacturer Part Number=DRV5032FBDBZR, Packaging="Cut Tape", Pricing 1="1=0.80000, 5=0.76600, 10=0.66600, 25=0.58520, 50=0.48600, 100=0.41400, 500=0.36000, 1000=0.31500 (USD)", RoHS=No, Sensing Method="Hall Effect", Stock 1=6326, Supplier 1=Digi-Key
U12: library part CMP-0859-00228-3, "CONFIGURABLE MULTIPLE-FUNCTION GATE, DBV0006A, LARGE T&R", Case/Package=SOT-23, High Level Output Current=-32mA, Low Level Output Current=32mA, Manufacturer="Texas Instruments", Max Operating Temperature=125°C, Max Supply Voltage=5.5V, Min Operating Temperature=-40°C, Min Supply Voltage=1.65V, Package Quantity=3000, Quiescent Current=10uA, Supplier Part Number 1=296-15574-1-ND, Category="Logic Gates", ComponentLink1Description=https://www.ti.com:443/lit/ds/symlink/sn74lvc1g57.pdf?src-supplier=IHS+Markit, ComponentLink1URL=https://www.ti.com:443/lit/ds/symlink/sn74lvc1g57.pdf?src-supplier=IHS+Markit, ComponentLink2Description=https://datasheet.ciiva.com/15090/getdatasheetpartid-173082-15090973.pdf?src-supplier=Verical, ComponentLink2URL=https://datasheet.ciiva.com/15090/getdatasheetpartid-173082-15090973.pdf?src-supplier=Verical, ComponentLink3Description=https://datasheet.ciiva.com/1880/sn74lvc1g57-1880083.pdf?src-supplier=Digi-Key, ComponentLink3URL=https://datasheet.ciiva.com/1880/sn74lvc1g57-1880083.pdf?src-supplier=Digi-Key, ComponentLink4Description=https://datasheet.ciiva.com/1880/sn74lvc1g57-1880084.pdf?src-supplier=Digi-Key, ComponentLink4URL=https://datasheet.ciiva.com/1880/sn74lvc1g57-1880084.pdf?src-supplier=Digi-Key, ComponentLink5Description=https://datasheet.ciiva.com/46395/1882763-46395382.pdf?src-supplier=Element14, ComponentLink5URL=https://datasheet.ciiva.com/46395/1882763-46395382.pdf?src-supplier=Element14, ComponentLink6Description=https://datasheet.ciiva.com/46439/1834192-46439175.pdf?src-supplier=Element14, ComponentLink6URL=https://datasheet.ciiva.com/46439/1834192-46439175.pdf?src-supplier=Element14, ComponentLink7Description=https://datasheet.ciiva.com/7783/1771418-7783483.pdf?src-supplier=Element14, ComponentLink7URL=https://datasheet.ciiva.com/7783/1771418-7783483.pdf?src-supplier=Element14, ComponentLink8Description=https://datasheet.ciiva.com/7783/1771418-7783484.pdf?src-supplier=Element14, ComponentLink8URL=https://datasheet.ciiva.com/7783/1771418-7783484.pdf?src-supplier=Element14, ComponentLink9Description=https://datasheet.ciiva.com/1880/sn74lvc1g57-1880082.pdf?src-supplier=Digi-Key, ComponentLink9URL=https://datasheet.ciiva.com/1880/sn74lvc1g57-1880082.pdf?src-supplier=Digi-Key, ComponentLink10Description=https://datasheet.ciiva.com/48702/001075107-da-01-en-ic-mult-fun-sn74lvc1g57dbvr-sot-23-6-tid-48702374.pdf?src-supplier=Conrad, ComponentLink10URL=https://datasheet.ciiva.com/48702/001075107-da-01-en-ic-mult-fun-sn74lvc1g57dbvr-sot-23-6-tid-48702374.pdf?src-supplier=Conrad, Contact Plating=Gold, Height=1.3mm, Lead Free="Lead Free", Length=3.05mm, Logic Function="NAND GATE,AND GATE,NOR GATE,OR GATE,Inverter,Multi Function", Manufacturer Part Number=SN74LVC1G57DBVR, Max Output Current=32mA, Mount="Surface Mount", Number of Bits=1, Number of Circuits=1, Number of Elements=1, Number of Gates=1, Number of Input Lines=2, Number of Inputs=3, Number of Output Lines=1, Number of Outputs=1, Number of Pins=6, Output Current=32mA, Packaging="Tape and Reel", Pricing 1="1=0.37000, 10=0.28100, 25=0.25320, 100=0.17480, 250=0.14720, 500=0.11960, 1000=0.09200 (USD)", Propagation Delay=6.3ns, Radiation Hardening=No, REACH SVHC="No SVHC", RoHS=Yes, Schmitt Trigger Input=Yes, Stock 1=11185, Supplier 1=Digi-Key, Termination=SMD/SMT, Turn-On Delay Time=6.1ns, Weight=0.000229oz, Width=1.75mm